# EAGLE board boardFinal (EAGLE 9.6.2)
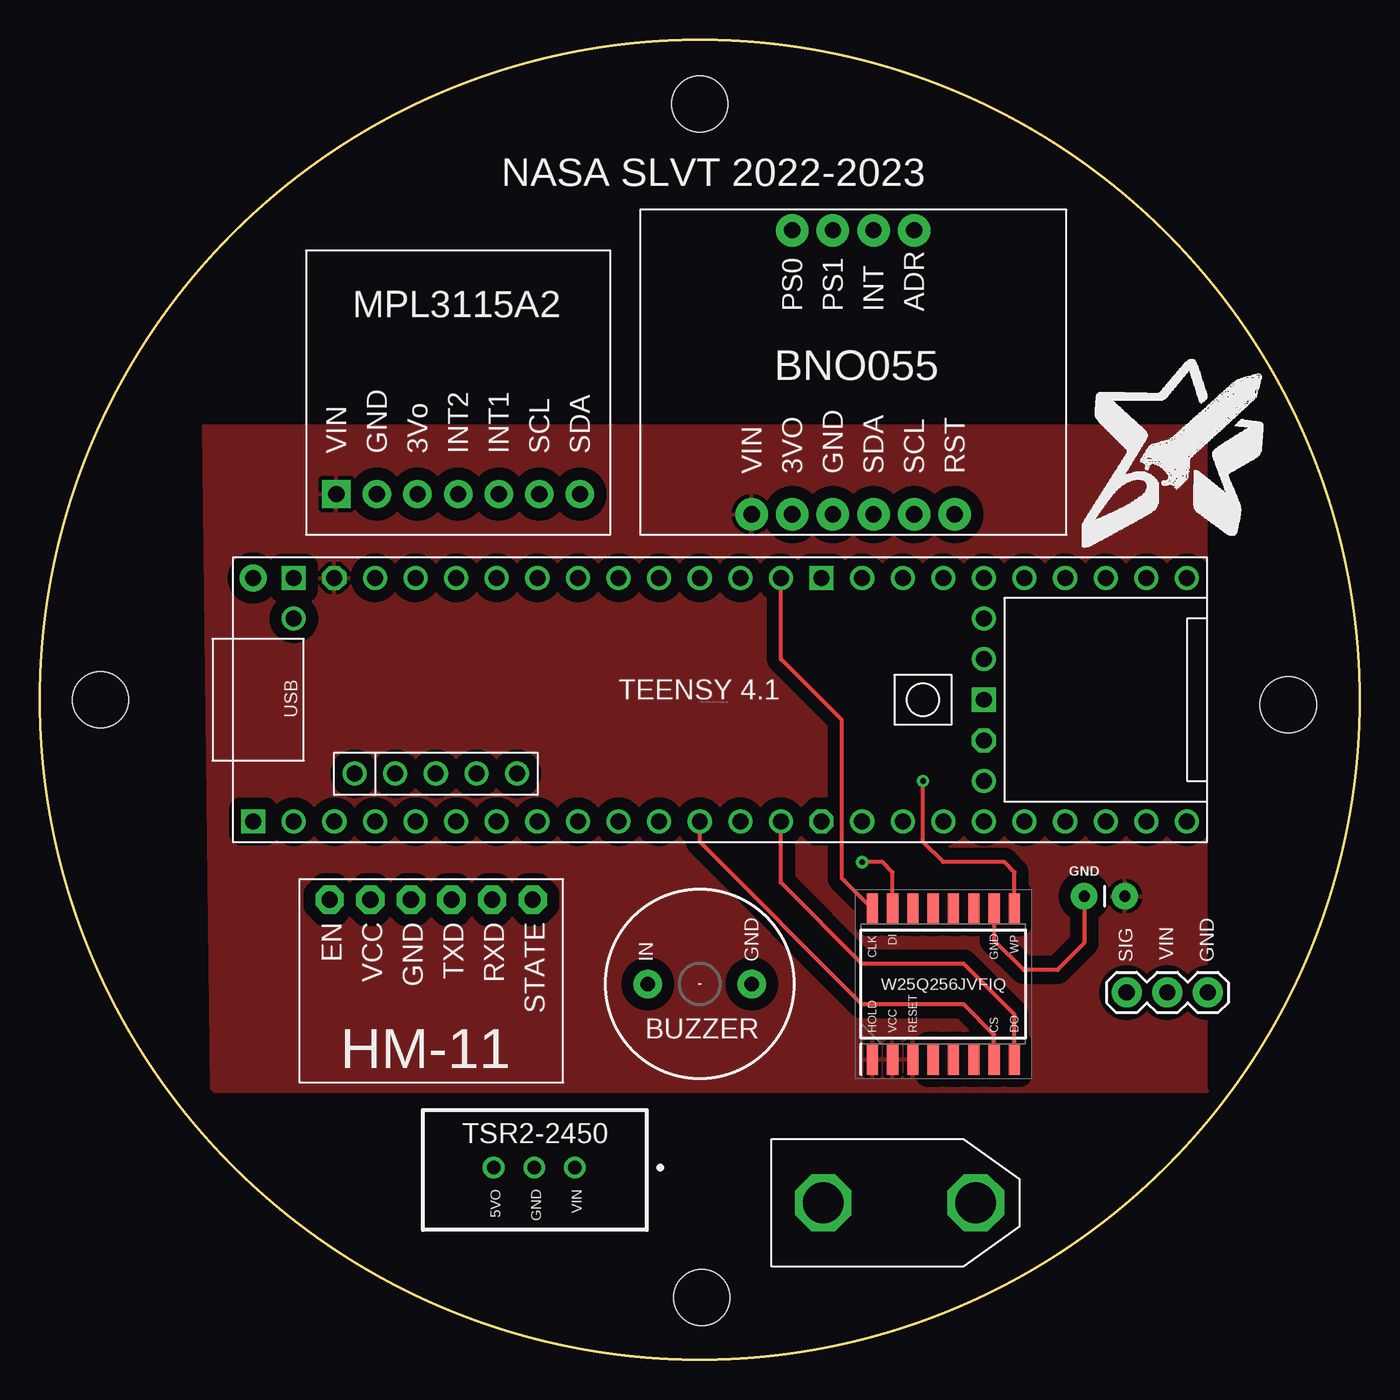
[diagram p0: board, top side]
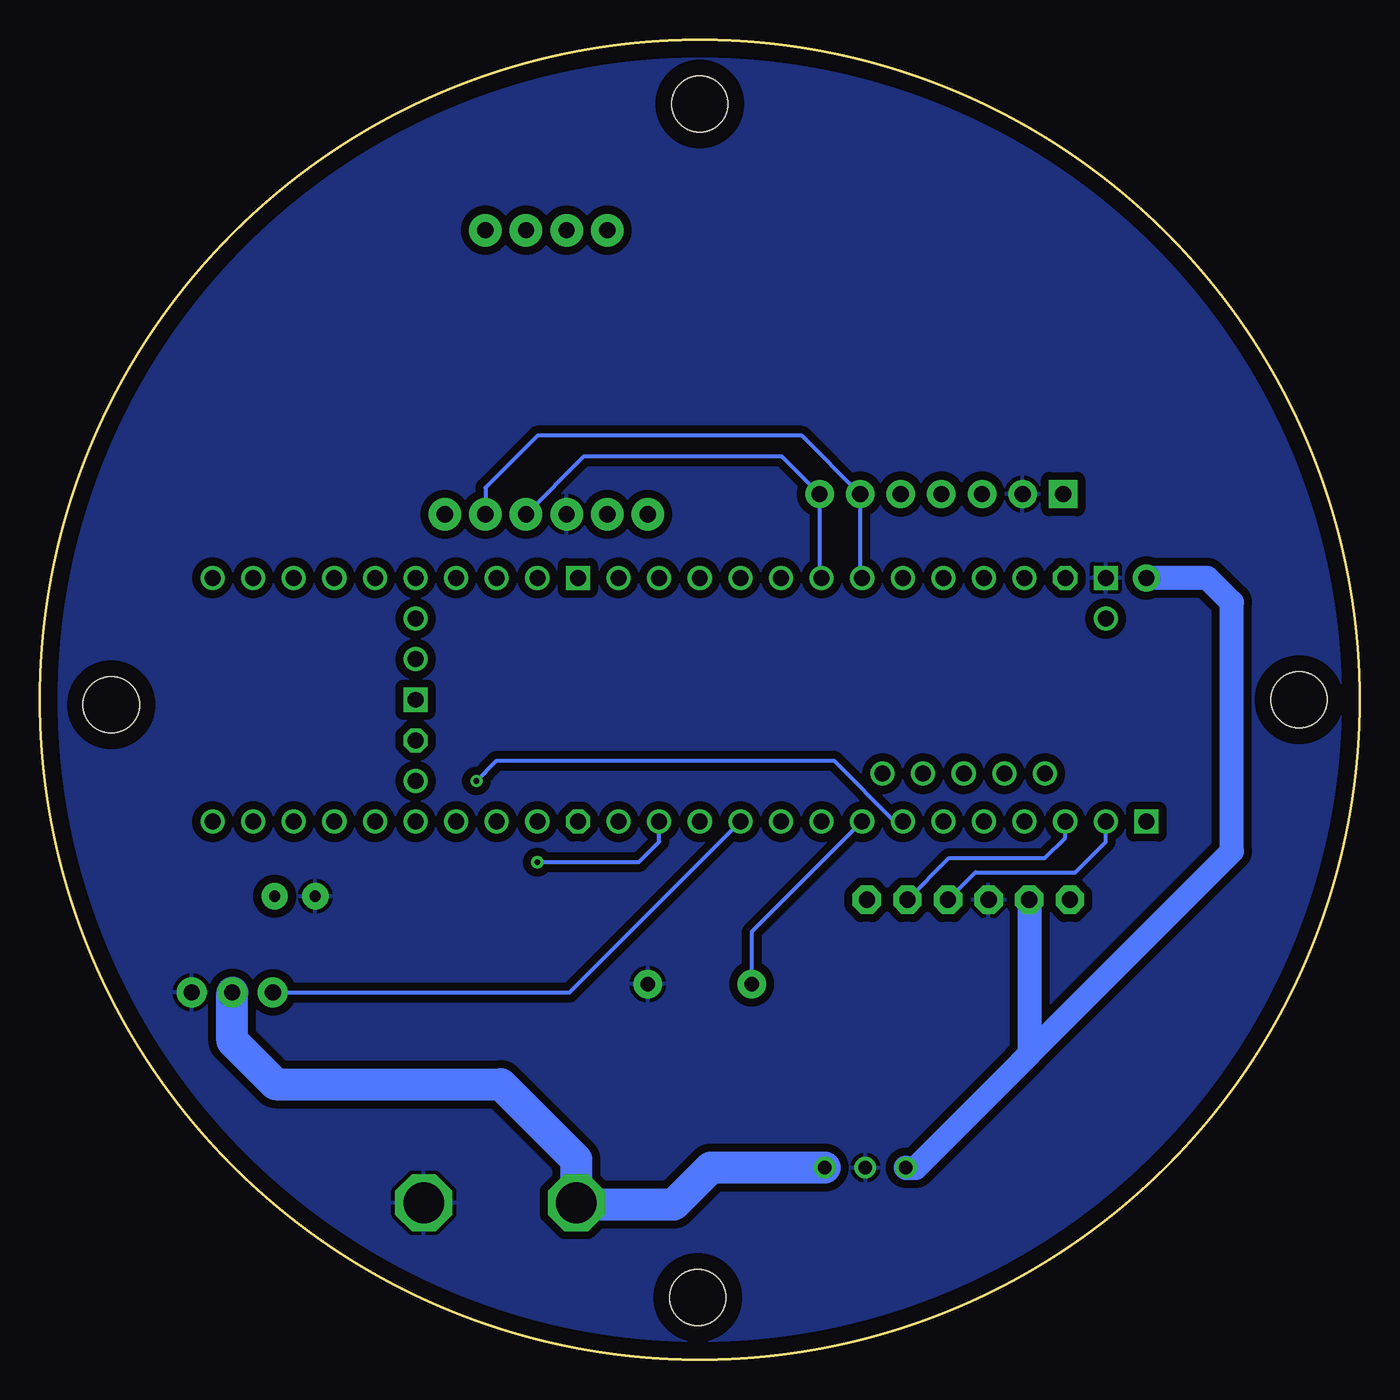
[diagram p1: board, bottom side, seen from below]

Size 82.55 x 82.55 mm. Coordinates in mm from the lower left corner, seen from the top.
Outline: circle at 41.27,41.27 radius 41.27
Copper layers (1*16): Top 0.035mm / dielectric 1.5mm / Bottom 0.035mm
Design rules "default *": minimum track width 6mil, minimum drill 0.35mm, track to track 6mil, track to pad 6mil, pad to pad 6mil, via to via 6mil, smd to smd 6mil, copper to edge 40mil, drill to drill 6mil, minimum pad ring 10mil, minimum via ring 8mil, stop-mask expansion 4mil, vias tented up to drill 0.35mm, thermal gap 10mil
Holes 3.5 mm at 41.39,3.89 3.77,41.27 41.27,78.55 78.09,40.97

## Footprints (pad centres in the part's own frame; a part is rotated, then mirrored left to right if it is on the bottom)
BUZZER-12MM = drill 0.9 pad 1.778: + 3.25,0; - -3.25,0
CAP-PTH-2.54 = drill 0.7 pad 1.651: 1 -1.27,0; 2 1.27,0
SOIC127P1032X264-16N = smd 1.93 x 0.7: 1 -4.71,4.445; 2 -4.71,3.175; 3 -4.71,1.905; 4 -4.71,0.635; 5 -4.71,-0.635; 6 -4.71,-1.905; 7 -4.71,-3.175; 8 -4.71,-4.445; 9 4.71,-4.445; 10 4.71,-3.175; 11 4.71,-1.905; 12 4.71,-0.635; 13 4.71,0.635; 14 4.71,1.905; 15 4.71,3.175; 16 4.71,4.445
1X03 = drill 1.016 pad 1.88: 1 0,0; 2 2.54,0; 3 5.08,0
TSR-2 = drill 0.85 pad 1.35: 1 4.5,-3.89; 2 7.04,-3.89; 3 9.58,-3.89
BNO055 = drill 1.016 pad 2.032: 3VO 9.525,1.27; ADR 17.145,19.05; GND 12.065,1.27; INT 14.605,19.05; PS0 9.525,19.05; PS1 12.065,19.05; RST 19.685,1.27; SCL 17.145,1.27; SDA 14.605,1.27; VIN 6.985,1.27
MPL3115A2 = drill 1.016 pad 1.778: 3VO 6.985,2.54; GND 4.445,2.54; INT1 12.065,2.54; INT2 9.525,2.54; SCL 14.605,2.54; SDA 17.145,2.54 | drill 1.016 pad 1.778 square: VIN 1.905,2.54
TENNSY41-E = drill 1: 0-RX1/CS1/CRX2 -27.94,-7.62; 1-TX1/MISO1/CTX2 -25.4,-7.62; 2-OUT2 -22.86,-7.62; 3-LRCLK2 -20.32,-7.62; 4-BCLK2 -17.78,-7.62; 5-IN2 -15.24,-7.62; 6-OUT1D -12.7,-7.62; 7-RX2/OUT1A -10.16,-7.62; 8-TX2/IN1 -7.62,-7.62; 9-OUT1C -5.08,-7.62; 10-CS\MQSR -2.54,-7.62; 11-MOSI/CTX1 0,-7.62; 12-MISO/MQSL 2.54,-7.62; 13-SCK/LED 2.54,7.62; 14-A0/TX3/SPDIF_OUT 0,7.62; 15-A1/RX3/SPDIF_IN -2.54,7.62; 16-A2/RX4/SCL1 -5.08,7.62; 17-A3/TX4/SDA1 -7.62,7.62; 18-A4/SDA0 -10.16,7.62; 19-A5/SCL0 -12.7,7.62; 20-A6/TX5/LRCLK1 -15.24,7.62; 21-A7/RX5/BCLK1 -17.78,7.62; 22-A8/CTX1 -20.32,7.62; 23-A9/CRX1/MCLK1 -22.86,7.62; 24-A10/TX6/SCL2 7.62,-7.62; 25-A11/RX6/SDA2 10.16,-7.62; 26-A12/MOSI1 12.7,-7.62; 27-A13/SCK1 15.24,-7.62; 28-RX7 17.78,-7.62; 29-TX7 20.32,-7.62; 30-CRX3 22.86,-7.62; 31-CTX3 25.4,-7.62; 32-OUT1B 27.94,-7.62; 33-MCLK2 27.94,7.62; 34-RX8 25.4,7.62; 35-TX8 22.86,7.62; 36-PWM 20.32,7.62; 37-PWM 17.78,7.62; 38-A14/CS/IN1 15.24,7.62; 39-A15/CS/OUT1A 12.7,7.62; 40-A16/CS1 10.16,7.62; 41-A17/MISO1 7.62,7.62; +5V -24.13,-4.62; DM -21.59,-4.62; DP -19.05,-4.62; GND4 -16.51,-4.62; GND5 -13.97,-4.62; ON/OFF 15.24,5.08; PROGRAM 15.24,2.54; VBAT 15.24,-5.08; VUSB -27.94,5.08 | drill 1 octagon: 3V3-1 5.08,-7.62; 3V3-2 15.24,-2.54; 3V3-3 -25.4,7.62 | drill 1 square: GND1 -30.48,-7.62; GND2 15.24,0; GND3 5.08,7.62; GND6 -27.94,7.62 | drill 1 pad 1.676: VIN -30.48,7.62
HM-11 = drill 1.016 pad 1.778 octagon: EN 14.605,1.27; GND 9.525,1.27; RXD 4.445,1.27; STATE 1.905,1.27; TXD 6.985,1.27; VCC 12.065,1.27
XT60 = drill 2.54 octagon: + 3.23,0; - 12.77,0

## Placement (x,y rotation side)
-  BUZZER-PTH  [BUZZER-12MM]  41.27,23.49 0 top
GND  0.1uF  [CAP-PTH-2.54]  66.6,28.98 0 top
IC1  W25Q256JVFIQ  [SOIC127P1032X264-16N]  56.52,23.49 90 top
M1  SERVO  [1X03]  67.98,22.96 0 top
TSR2-2450  TSR_2-2450  [TSR-2]  37.96,8.12 180 top
U$1  BNO055  [BNO055]  37.54,51.6 0 top
U$2  MPL3115A2  [MPL3115A2]  16.64,51.6 0 top
U$3  TEENSY41-E  [TENNSY41-E]  43.81,41.27 0 top
U$4  HM-11  [HM-11]  32.73,30.04 180 top
U$5  XT60  [XT60]  45.77,9.8 0 top

## Library data of the parts
- = SparkFun-Electromechanical; PROD_ID: COMP-08253; SF_SKU: COM-07950
GND = SparkFun-Capacitors; PROD_ID: CAP-09128
IC1 = W25Q256JVFIQ; ARROW_PART_NUMBER: W25Q256JVFIQ; ARROW_PRICE-STOCK: https://www.arrow.com/en/products/w25q256jvfiq/winbond-electronics?region=nac; DESCRIPTION: 256M-bit Serial Flash Memory with uniform 4KB sectors and Dual/Quad SPI; HEIGHT: 2.64mm; MANUFACTURER_NAME: Winbond; MANUFACTURER_PART_NUMBER: W25Q256JVFIQ; MOUSER_PART_NUMBER: 454-W25Q256JVFIQ; MOUSER_PRICE-STOCK: https://www.mouser.co.uk/ProductDetail/Winbond/W25Q256JVFIQ?qs=qSfuJ%252Bfl%2Fd66Mf%2FmOCw4Wg%3D%3D
M1 = SparkFun-Electromechanical
TSR2-2450 = TSR_2-2450; DESCRIPTION: 2 Amp POL switching regulator, 3.0 to -36 VDC input, pos.-pos. circuit, LM78 compatible, SIP-3; HEIGHT: mm; MANUFACTURER_NAME: Traco Power; MANUFACTURER_PART_NUMBER: TSR 2-2450; MOUSER_PART_NUMBER: 495-TSR2-2450; MOUSER_PRICE-STOCK: https://www.mouser.co.uk/ProductDetail/TRACO-Power/TSR-2-2450?qs=NtE2QagKf6RzknAolzm%2FTQ%3D%3D
U$1 = BNO055
U$2 = MPL3115A2
U$3 = teensy
U$4 = HM-11
U$5 = XT60

## Nets
3.3V: GND.2 IC1.1 IC1.2 IC1.3 U$1.VIN U$2.VIN U$3.3V3-3
5V: TSR2-2450.3 U$3.VIN U$4.VCC
7.4V+: M1.2 TSR2-2450.1 U$5.+
BLERXD: U$3.1-TX1/MISO1/CTX2 U$4.RXD
BLETXD: U$3.0-RX1/CS1/CRX2 U$4.TXD
BUZZER: -.- U$3.6-OUT1D
CS: IC1.7 U$3.10-CS\MQSR
GND: -.+ GND.1 IC1.10 M1.3 TSR2-2450.2 U$1.GND U$2.GND U$3.GND6 U$4.GND U$5.-
MISO: IC1.8 U$3.12-MISO/MQSL
MOSI: IC1.15 U$3.11-MOSI/CTX1
SCK: IC1.16 U$3.13-SCK/LED
SCL: U$1.SCL U$2.SCL U$3.19-A5/SCL0
SDA: U$1.SDA U$2.SDA U$3.18-A4/SDA0
SERVO: M1.1 U$3.9-OUT1C
WP: IC1.9 U$3.5-IN2

## Tracks (layer width: path | path; a pad name or v marks a point on that pad's centre or on a via)
3.3V
  pour Top (isolate 0.762): 72.78,58.42 72.97,58.61 72.97,16.93 73.16,16.74 10.91,16.74 10.72,16.93 10.22,58.42
5V
  Bottom 1.5: TSR2-2450.3 28.35,11.98 27.76,11.98 21.16,18.58 | 21.16,18.58 20.66,19.07 U$4.VCC | 21.16,18.58 21.16,18.62 7.99,31.79 7.99,47.36 9.52,48.89 U$3.VIN
7.4V+
  Bottom 2: M1.2 70.52,19.93 67.82,17.22 53.71,17.22 49,12.51 U$5.+ 48.89,9.69 42.91,9.69 40.6,12 TSR2-2450.1
BLERXD
  Bottom 0.25: U$4.RXD 25.68,31.37 19.68,31.37 18.41,32.64 U$3.1-TX1/MISO1/CTX2
BLETXD
  Bottom 0.25: U$4.TXD 24.03,30.48 17.78,30.48 15.88,32.38 U$3.0-RX1/CS1/CRX2
BUZZER
  Bottom 0.25: U$3.6-OUT1D 38.02,26.74 -.-
CS
  Top 0.25: IC1.7 59.69,20.32 57.78,22.22 51.44,22.22 41.27,32.38 U$3.10-CS\MQSR
GND
  Top 0.25: GND.1 65.33,26.05 63.65,24.37 61.54,24.37 59.69,26.22 IC1.10
  pour Bottom (isolate 0.508): -8.26,87 -8.26,-8.26 95.88,-8.26 95.88,87
MISO
  Top 0.25: IC1.8 60.96,21.59 57.78,24.76 51.44,24.76 46.35,29.84 U$3.12-MISO/MQSL
MOSI  (via drill 0.35)
  Top 0.25: IC1.15 53.34,30.48 52.7,31.11 v51.44,31.11
  Bottom 0.25: v51.44,31.11 45.09,31.11 43.81,32.38 U$3.11-MOSI/CTX1
SCK
  Top 0.25: IC1.16 50.3,29.98 50.16,30.11 50.16,40 46.35,43.81 U$3.13-SCK/LED
SCL
  Bottom 0.25: U$3.19-A5/SCL0 31.24,49.02 U$2.SCL 34.89,57.78 51.44,57.78 54.69,54.53 U$1.SCL
SDA
  Bottom 0.25: U$3.18-A4/SDA0 33.78,49.02 U$2.SDA 36.16,56.52 48.5,56.52 U$1.SDA
SERVO
  Bottom 0.25: U$3.9-OUT1C 49.43,22.96 M1.1 68.02,22.96
WP  (via drill 0.35)
  Top 0.25: IC1.9 60.96,30.48 60.33,31.11 56.52,31.11 55.24,32.38 v55.24,36.2
  Bottom 0.25: v55.24,36.2 53.97,37.46 32.89,37.46 29.08,33.66 U$3.5-IN2

## Text on the board
tNames: NASA SLVT 2022-2023 | C:/Users/Muthu/Desktop/image.bmp